# Altium PCB PCB_1.PcbDoc
Units mm, origin at the board's own origin, x right, y up, seen from the top; angles counter-clockwise.
Board outline 55.75 x 47.62 mm, 2 copper layers (Top Layer, Bottom Layer); 26 components, 18 nets, 56 pads, 0 vias.
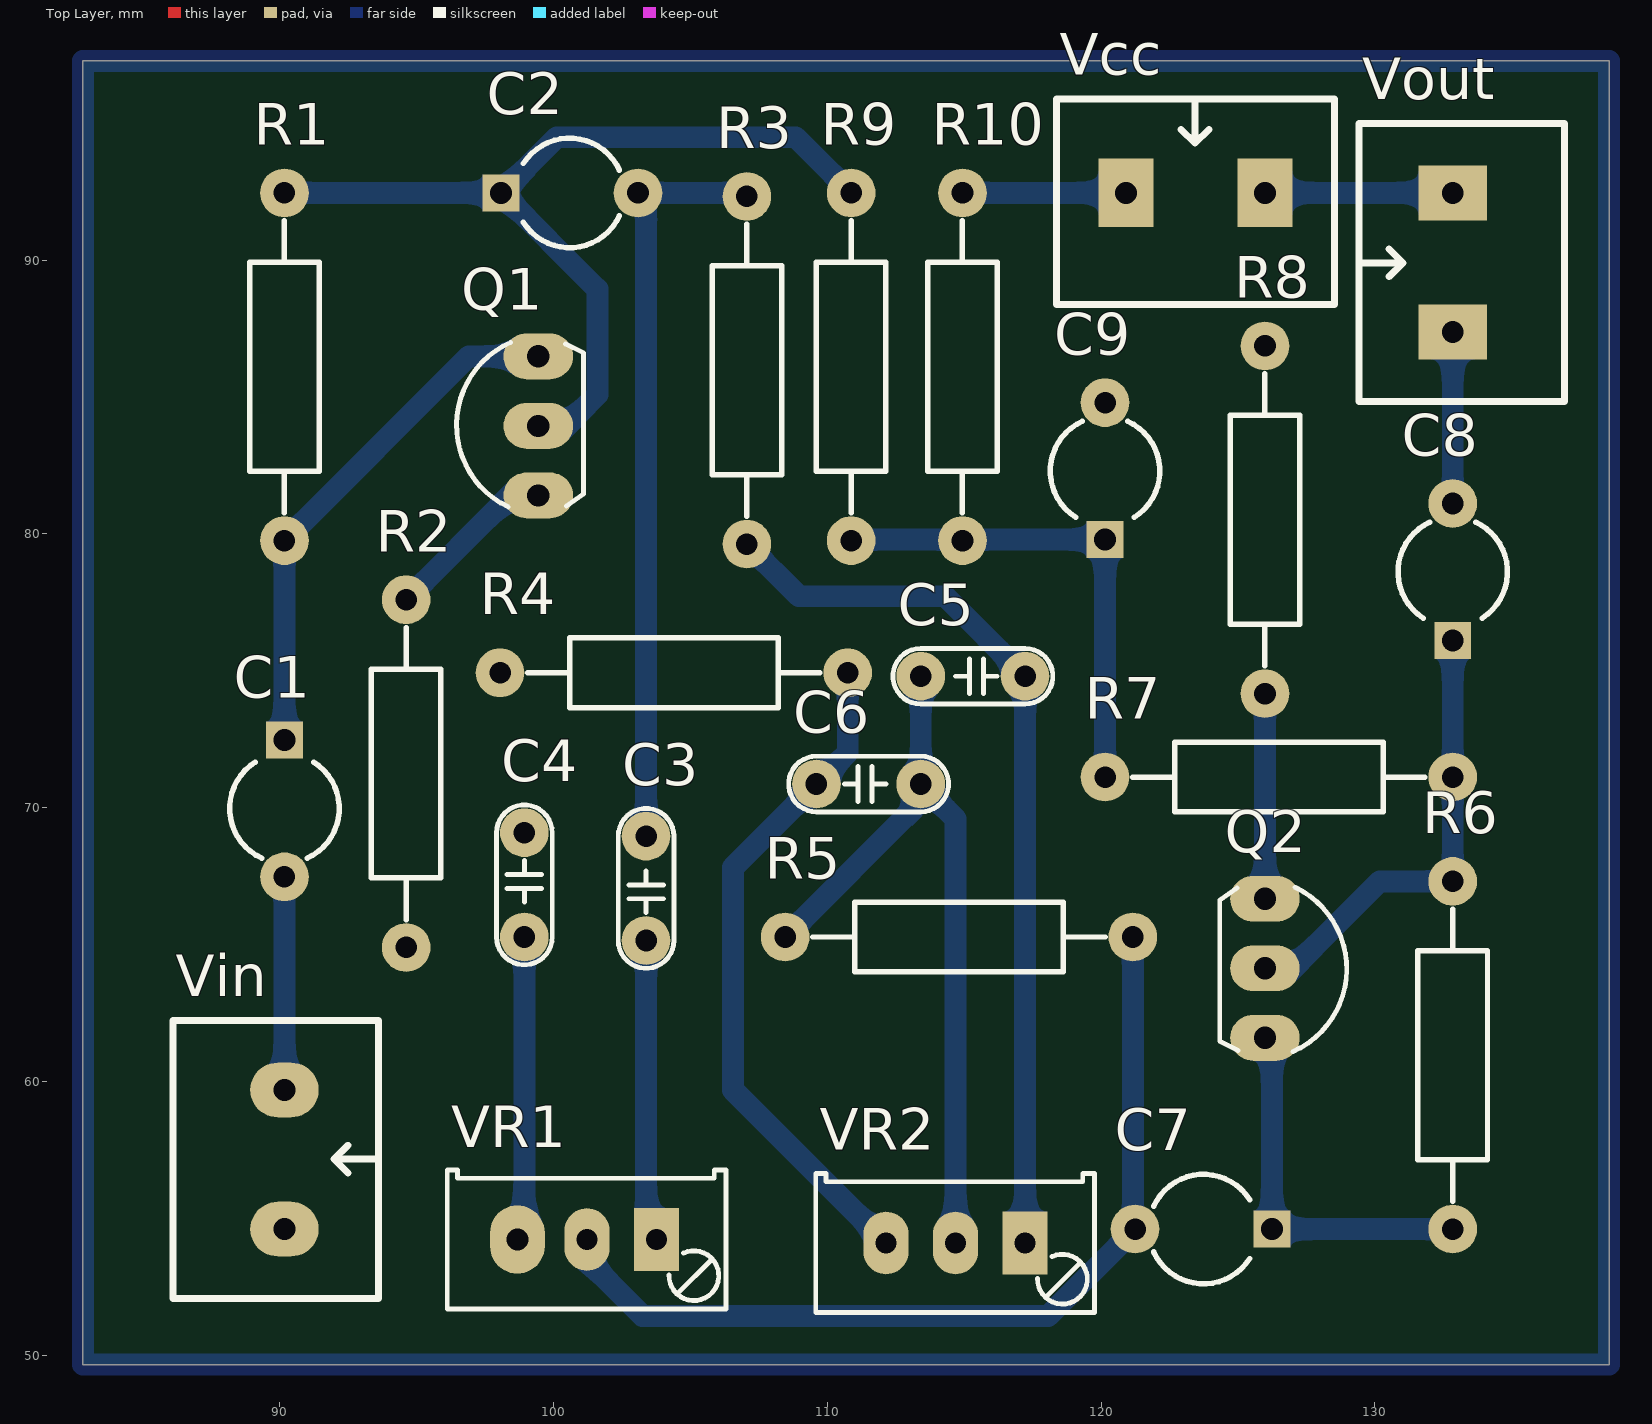
[diagram p0: Top Layer view]
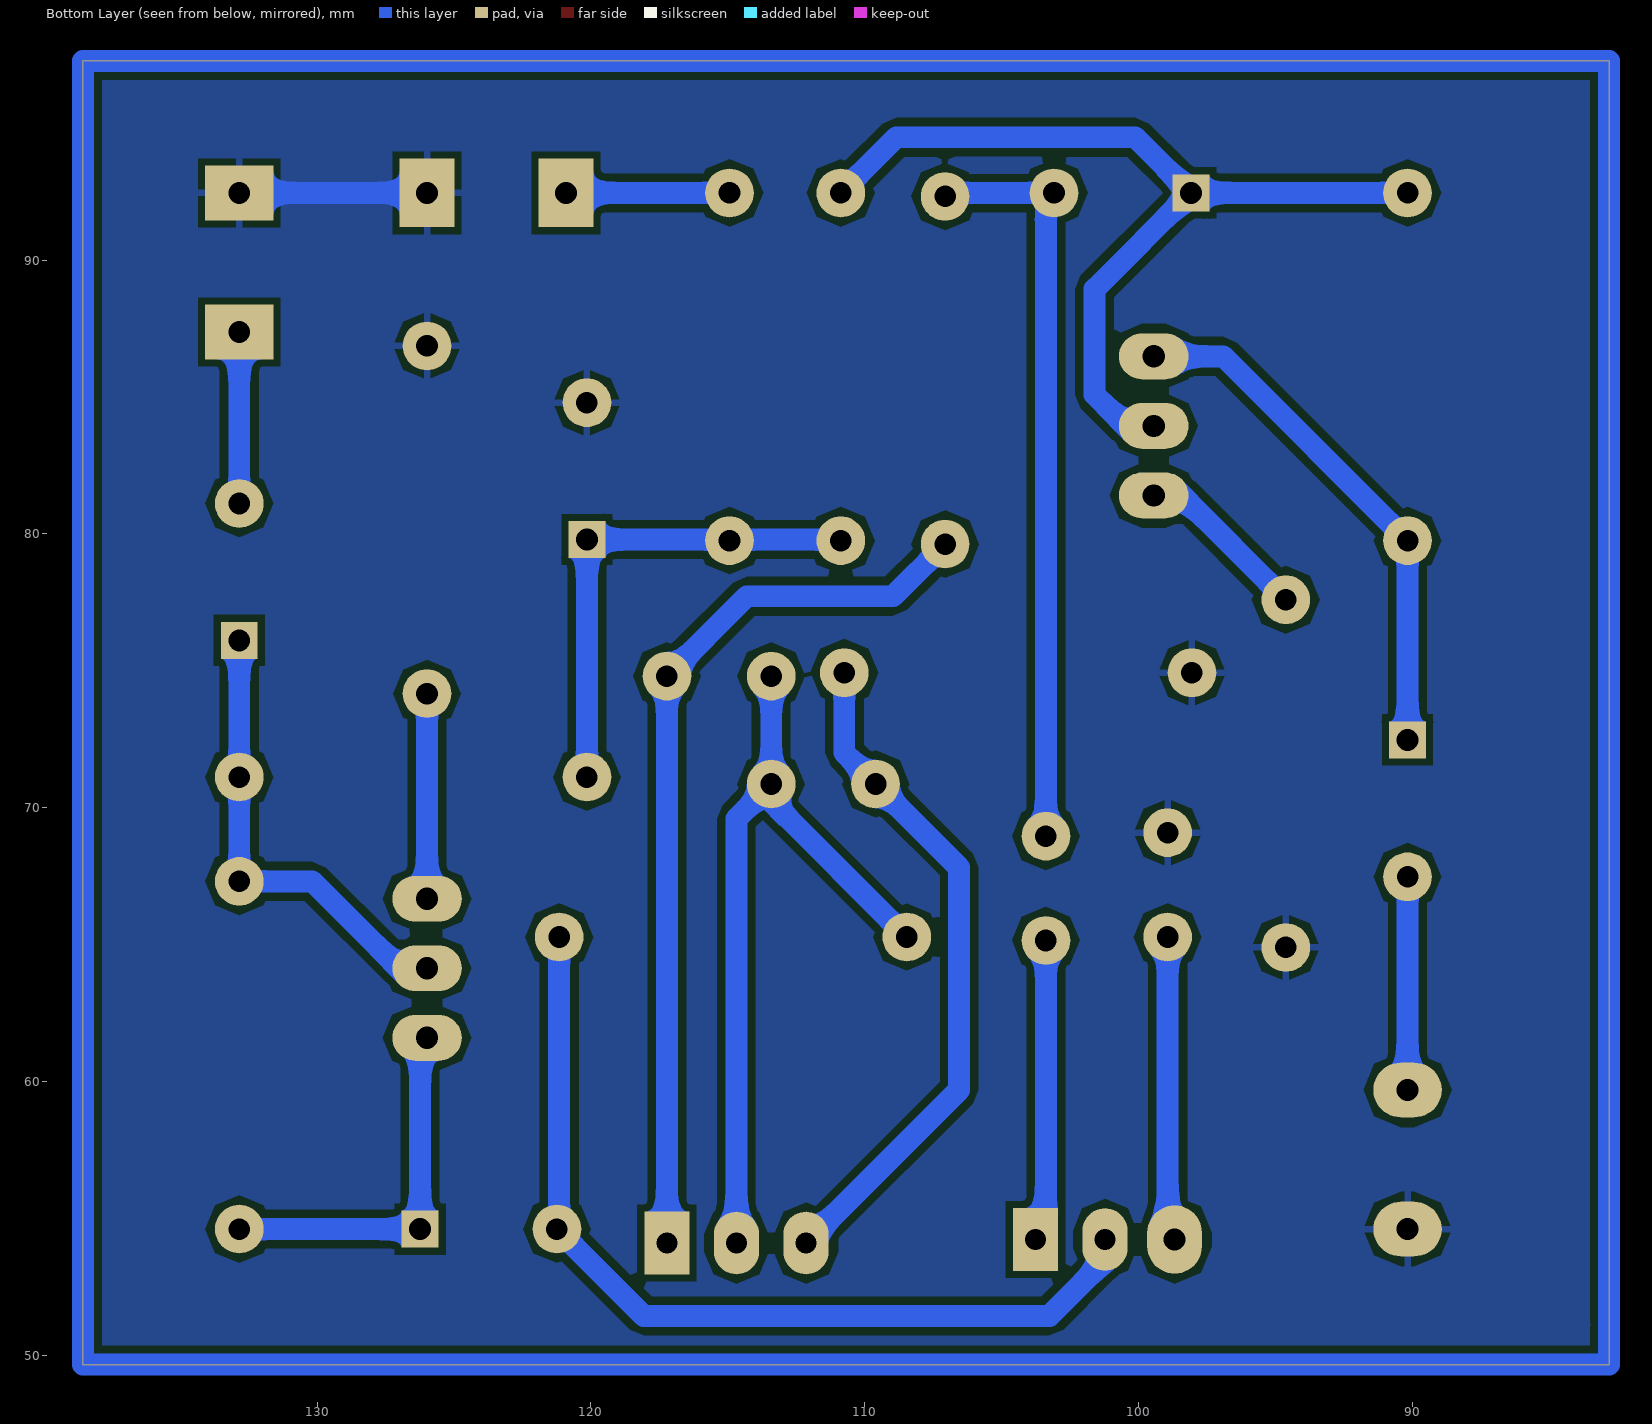
[diagram p1: Bottom Layer view, seen from below]

## Layer stack, top to bottom
Top Solder: solder mask 0.0102, Solder Resist, Dk 3.5
Top Layer: signal copper 0.0356
Dielectric 1: dielectric 0.32, FR-4, Dk 4.8
Bottom Layer: signal copper 0.0356
Bottom Solder: solder mask 0.0102, Solder Resist, Dk 3.5

## Board outline
82.804,49.657 138.557,49.657 138.557,97.282 82.804,97.282

## Design rules (kind name [scope] priority, off if disabled: settings)
Clearance [All] p1: gap=0.254
PolygonConnect [All] p1: connectstyle=Relief reliefconductorwidth=0.254 reliefentries=4 polygonreliefangle="90 Angle" airgapwidth=0.254
RoutingVias [All] p1: holewidth=0.711 width=1.27 viastyle="Through Hole" minholewidth=0.711 minwidth=1.27 maxholewidth=0.711 maxwidth=1.27
SolderMaskExpansion [All] p1: expansion=0.102
Width [All] p1: maxlimit=1 minlimit=0.8 preferedwidth=0.8
30 further rules are at their usual default settings.

## Components (designator, comment, footprint, x,y, rotation, side; value= is the part's Value field where it differs from the comment)
C1 "Cap2" CAPR5-4X5 90.17,69.977 r270 top
C2 "Cap2" CAPR5-4X5 100.584,92.456 r0 top
C3 "Cap Non-Pol" CN1.5 103.378,65.151 r90 top
C4 "Cap Non-Pol" CN1.5 98.933,69.088 r270 top
C5 "Cap Non-Pol" CN1.5 117.221,74.803 r180 top
C6 "Cap Non-Pol" CN1.5 109.601,70.866 r0 top
C7 "Cap2" CAPR5-4X5 123.738,54.61 r180 top
C8 "Cap2" CAPR5-4X5 132.842,78.613 r90 top
C9 "Cap2" CAPR5-4X5 120.142,82.296 r90 top
Q1 "C1815" QTO-92 99.441,83.947 r90 top
Q2 "C1815" QTO-92 125.984,64.135 r270 top
R1 "Res" AXIAL-0.5 90.17,86.106 r90 top
R2 "Res" AXIAL-0.5 94.615,71.247 r90 top
R3 "Res" AXIAL-0.5 107.061,85.979 r90 top
R4 "Res" AXIAL-0.5 104.394,74.93 r0 top
R5 "Res" AXIAL-0.5 114.808,65.278 r180 top
R6 "Res" AXIAL-0.5 132.842,60.96 r90 top
R7 "Res" AXIAL-0.5 126.492,71.12 r180 top
R8 "Res" AXIAL-0.5 125.984,80.518 r270 top
R9 "Res" AXIAL-0.5 110.871,86.106 r90 top
R10 "Res" AXIAL-0.5 114.935,86.106 r90 top
Vcc "Domino 2" "DOMINO 2- 5mm"#1 123.444,92.456 r0 top
Vin "Domino 2" "DOMINO 2- 5mm"#2 90.17,57.15 r270 top
Vout "Domino 2" "DOMINO 2- 5mm"#1 132.842,89.916 r90 top
VR1 "50K" VR-S3#1 103.759,54.229 r180 top
VR2 "50K" VR-S3#2 117.221,54.102 r180 top

## Footprints (in the part's own frame and the unit in brackets; to place one, negate y for a bottom-side part, rotate by r counter-clockwise, add the part's x,y. Pads: shape width x height; smd on the part's side, far side on the other; paste and mask are expansions set on the pad)
AXIAL-0.5 [mil] "Axial Device, Thru-Hole; 2 Leads; 0.5 in Pin Spacing"
  round 70 hole 31: 1(-250,0) 2(250,0)
  silkscreen extent -210,-50 210,50
CAPR5-4X5 [mm] "Capacitor; 2 Leads"
  rect 1.35x1.35 hole 0.8: 1(-2.5,0)
  round 1.778 hole 0.787: 2(2.5,0)
  silkscreen extent -1.69,-2 1.82,2
CN1.5 [mil]
  round 70 hole 31: 1(0,0) 2(150,0)
  silkscreen extent -40,-40 190,40, body extent -40,-33 190,33, height 235
"DOMINO 2- 5mm"#1 [mm]
  rect 2x2.5 hole 0.8: 1(-2.54,0) 2(2.54,0)
  silkscreen extent -5.08,-4.08 5.08,3.43, body extent -5,-4.07 5,3.43, height 10
"DOMINO 2- 5mm"#2 [mm]
  oval 2x2.5 hole 0.8: 1(-2.54,0) 2(2.54,0)
  silkscreen extent -5.08,-4.08 5.08,3.43, body extent -5,-4.07 5,3.43, height 10
QTO-92 [mil] "TO-92"
  oval 66x100 hole 32: 1(-100,0) 2(0,0) 3(100,0)
  silkscreen extent -117,-65 120,118, body extent -109,-66 109,95, height 245
VR-S3#1 [mil] "Variable Resistor"
  rect 65x90 hole 30: 1(0,0)
  oval 65x90 hole 30: 2(100,0)
  oval 78.74x98.43 hole 31.5: 3(200,0)
  silkscreen extent -100,-100 301,100, body extent -91,-98 291,90, height 430
VR-S3#2 [mil] "Variable Resistor"
  rect 65x90 hole 30: 1(0,0)
  oval 65x90 hole 30: 2(100,0) 3(200,0)
  silkscreen extent -100,-100 301,100, body extent -91,-98 291,90, height 430

## Part data
C1 C2 C3 C4 C5 C6 C7 C8 C9: "Capacitor"
Q1 Q2: "NPN Bipolar Transistor"
R1 R2 R3 R4 R5 R6 R7 R8 R9 R10: library part "Res Semi", "Semiconductor Resistor"
Vcc Vin Vout: "Domino, 2-Pin"
VR1 VR2: library part VR-S, "Var Resistor"

## Nets (pads, with @x,y where several pads share a name; then routed paths per layer and width w, separated by ;. In a path a pad name is that pad's centre, name@x,y a point inside that pad or via, vN(x,y) a via of type N, cw(c..) or ccw(c..) an arc to the next point about the centre after c; other vN are vias at no path point)
GND: C4.1 C9.2 R2.1 R4.1 R8.1 Vcc.2 Vin.2 Vout.2 | length 6.9
  Bottom Layer w0.8: Vcc.2 Vout.2
NetC1_1: C1.1 Q1.3 R1.1 | length 19.3
  Bottom Layer w0.8: C1.1 R1.1 96.901,86.487 Q1.3
NetC1_2: C1.2 Vin.1 | length 7.8
  Bottom Layer w0.8: Vin.1 C1.2
NetC2_1: C2.1 Q1.2 R1.2 R9.2 | length 33.8
  Bottom Layer w0.8: R1.2 C2.1 ; Q1.2 100.457,83.947 101.6,85.09 101.6,88.94 C2.1 ; R9.2 108.839,94.488 100.116,94.488 C2.1
NetC2_2: C2.2 C3.2 R3.2 | length 27.5
  Bottom Layer w0.8: C3.2 103.378,92.162 C2.2 R3.2@106.934,92.456
NetC3_1: C3.1 VR1.1 | length 10.5
  Bottom Layer w0.8: VR1.1@103.378,54.61 C3.1
NetC4_2: C4.2 VR1.3 | length 10.8
  Bottom Layer w0.8: VR1.3@98.933,54.483 C4.2
NetC5_1: C5.1 R3.1 VR2.1 | length 32.9
  Bottom Layer w0.8: R3.1 108.966,77.724 114.3,77.724 C5.1 VR2.1
NetC5_2: C5.2 C6.2 R5.2 VR2.2 | length 28.9
  Bottom Layer w0.8: R5.2 113.411,70.231 C6.2 ; C5.2 C6.2 ; VR2.2 114.681,69.596 C6.2
NetC6_1: C6.1 R4.2 VR2.3 | length 24.9
  Bottom Layer w0.8: R4.2 110.744,72.009 C6.1 106.553,67.818 106.553,59.69 VR2.3
NetC7_1: C7.1 Q2.3 R6.1 | length 13.7
  Bottom Layer w0.8: Q2.3 126.238,61.341 C7.1 R6.1
NetC7_2: C7.2 R5.1 VR1.2 | length 33.6
  Bottom Layer w0.8: VR1.2 101.219,53.467 103.251,51.435 118.063,51.435 C7.2 121.158,54.69 R5.1
NetC8_1: C8.1 Q2.2 R6.2 R7.1 | length 17
  Bottom Layer w0.8: Q2.2 127,64.135 130.175,67.31 R6.2 R7.1 C8.1
NetC8_2: C8.2 Vout.1 | length 6.3
  Bottom Layer w0.8: C8.2 Vout.1
NetC9_1: C9.1 R7.2 R9.1 R10.1 | length 17.9
  Bottom Layer w0.8: R9.1@110.911,79.796 C9.1 R7.2
NetQ1_1: Q1.1 R2.2 | length 6.4
  Bottom Layer w0.8: R2.2 98.425,81.407 Q1.1
NetQ2_1: Q2.1 R8.2 | length 7.5
  Bottom Layer w0.8: Q2.1 R8.2
NetR10_2: R10.2 Vcc.1 | length 6
  Bottom Layer w0.8: R10.2 Vcc.1
copper on no net: | length 206.8
  Bottom Layer w0.254: 82.804,51.054 82.804,51.181
  Bottom Layer w0.8: 82.804,51.054 82.804,49.657 84.328,49.657 137.287,49.657 138.557,49.657 138.557,97.282 82.804,97.282 82.804,51.181

## Polygon pours and split planes (outlines as drawn)
GND on Bottom Layer "Top Layer-No Net" (solid, pour order 2): 83.058,97.028 83.185,97.155 138.049,97.155 138.049,50.038 138.176,49.911 138.049,50.038 82.931,50.038